# EAGLE board _SHOP MAINTENANCE AND SAFETY SYSTEM FINALLL (EAGLE 7.6.0)

Size 73.58 x 63.39 mm. Coordinates in mm from the lower left corner, seen from the top.
Outline: 0,0 56.82,0 56.82,53.33 0,53.33 0,0
Copper layers (1*16): Top 0.035mm / dielectric 1.5mm / Bottom 0.035mm
Design rules "default": minimum track width 10mil, minimum drill 24mil, track to track 8mil, track to pad 8mil, pad to pad 8mil, via to via 8mil, smd to smd 8mil, copper to edge 40mil, drill to drill 8mil, minimum pad ring 10mil, minimum via ring 8mil, stop-mask expansion 4mil, vias tented up to drill 0mil, thermal gap 10mil

## Footprints (pad centres in the part's own frame; a part is rotated, then mirrored left to right if it is on the bottom)
SNR6-D19.0MM = drill 1.3 pad 2: 1 -3.355,3.355; 2 -3.355,-3.355; 3 3.355,3.355; 4 3.355,-3.355; 5 0,4.75; 6 0,-4.75
M3XXH = drill 1.016 long: 1 -3.81,3.81; 2 -3.81,-3.81; O -6.35,-3.81; P 6.35,-3.81; P@ 6.35,3.81; S -6.35,3.81
2P-2.54-65/35MIL = drill 0.889 pad 1.651 square: 1 0,1.27 | drill 0.889 pad 1.651: 2 0,-1.27
PIEZO-22MM = drill 1 pad 2.54: P$1 -5,0; P$2 5,0
1X3P-2.54-2.54-11.6-3.0-BLACK-MALE = drill 0.889 pad 1.651 square: 1 0,2.54 | drill 0.889 pad 1.651: 2 0,0; 3 0,-2.54
PHOTORESISTOR-2.54 = drill 1 pad 1.5: P$1 -1.27,0; P$2 1.27,0
0207/10 = drill 0.813 octagon: 1 -5.08,0; 2 5.08,0
M251 = drill 0.813 long: 1 -2.54,0; 2 0,0; 3 2.54,0
ARDUINO_UNO = drill 1.016 pad 1.88: 0 63.5,50.8; 1 60.96,50.8; 2 58.42,50.8; 3 55.88,50.8; 3.3V 35.56,2.54; 4 53.34,50.8; 5 50.8,50.8; 5V 38.1,2.54; 6 48.26,50.8; 7 45.72,50.8; 8 41.656,50.8; 9 39.116,50.8; 10 36.576,50.8; 11 34.036,50.8; 12 31.496,50.8; 13 28.956,50.8; A0 50.8,2.54; A1 53.34,2.54; A2 55.88,2.54; A3 58.42,2.54; A4 60.96,2.54; A5 63.5,2.54; AREF 23.876,50.8; GND 26.416,50.8; GND. 43.18,2.54; GND.. 40.64,2.54; I/OREF 30.48,2.54; N/C 27.94,2.54; RESET 33.02,2.54; SCL 18.796,50.8; SDA 21.336,50.8; VIN 45.72,2.54 | hole 3.2: 66.04,7.62; 66.04,35.56; 15.24,50.8; 13.97,2.54

## Placement (x,y rotation side)
GAS1  [SNR6-D19.0MM]  5,175.18 0 top  (outside the outline)
K1  [M3XXH]  5,73.58 0 top  (outside the outline)
K2  [M3XXH]  5,162.48 0 top  (outside the outline)
K3  [M3XXH]  5,251.38 0 top  (outside the outline)
L1  [2P-2.54-65/35MIL]  5,137.08 0 top  (outside the outline)
L2  [2P-2.54-65/35MIL]  5,149.78 0 top  (outside the outline)
L3  [2P-2.54-65/35MIL]  5,276.78 0 top  (outside the outline)
M1  [2P-2.54-65/35MIL]  5,60.88 0 top
P1  5V  [2P-2.54-65/35MIL]  5,86.28 0 top  (outside the outline)
P2  5V  [2P-2.54-65/35MIL]  5,264.08 0 top  (outside the outline)
PIEZO1  [PIEZO-22MM]  5,187.88 0 top  (outside the outline)
PIEZO2  [PIEZO-22MM]  5,225.98 0 top  (outside the outline)
PING1  [1X3P-2.54-2.54-11.6-3.0-BLACK-MALE]  5,22.78 0 top
PIR1  [1X3P-2.54-2.54-11.6-3.0-BLACK-MALE]  5,48.18 0 top
PIR2  [1X3P-2.54-2.54-11.6-3.0-BLACK-MALE]  5,238.68 0 top  (outside the outline)
R1  [PHOTORESISTOR-2.54]  5,111.68 0 top  (outside the outline)
R2  1k‎Ω  [0207/10]  5,124.38 0 top  (outside the outline)
R3  100‎Ω  [0207/10]  5,200.58 0 top  (outside the outline)
R4  1k‎Ω  [0207/10]  5,213.28 0 top  (outside the outline)
R6  [PHOTORESISTOR-2.54]  5,289.48 0 top  (outside the outline)
R7  1k‎Ω  [0207/10]  5,302.18 0 top  (outside the outline)
S1  [M251]  5,98.98 0 top  (outside the outline)
SERVO1  [1X3P-2.54-2.54-11.6-3.0-BLACK-MALE]  5,35.48 0 top
U1  [ARDUINO_UNO]  5,10.08 0 top

## Library data of the parts
GAS1 K1-K3 L1-L3 M1 P1 P2 PIEZO1 PIEZO2 PING1 PIR1 PIR2 R1-R4 R6 R7 S1 SERVO1 U1 = AUTODESK_CIRCUITS_BREADBOARD

## Nets
N$1: PING1.3 U1.6
N$2: SERVO1.3 U1.7
N$3: PIR1.3 U1.9
N$4: K1.S M1.1
N$5: M1.2 S1.1
N$6: K2.P@ K2.S P1.2 S1.2
N$7: K1.2 U1.10
N$8: L1.2 L2.2
N$9: GAS1.1 R3.1
N$10: GAS1.5 PIEZO1.P$2 R3.2
N$11: K3.2 PIEZO1.P$1 U1.8
N$12: PIEZO2.P$1 U1.11
N$13: GAS1.3 R4.1 U1.A1
N$14: PIR2.1 U1.2
N$15: K3.P P2.2
N$16: K3.S L3.1
N$17: L3.2 P2.1
N$18: R1.P$1 R2.2 R6.P$2 R7.2 U1.A0
N$19: K1.P K1.P@ L1.1 P1.1
N$20: K2.O L2.1
N$21: K1.1 K3.1 PIEZO2.P$2 PING1.1 PIR1.1 PIR2.3 R1.P$2 R4.2 R7.1 SERVO1.1 U1.GND U1.GND..
N$22: GAS1.2 GAS1.4 GAS1.6 PING1.2 PIR1.2 PIR2.2 R2.1 R6.P$1 SERVO1.2 U1.5V

## Tracks (layer width: path | path; a pad name or v marks a point on that pad's centre or on a via)
N$1  (1 unrouted)
N$2  (1 unrouted)
N$3  (1 unrouted)
N$4  (1 unrouted)
N$5  (1 unrouted)
N$6  (3 unrouted)
N$7  (1 unrouted)
N$8  (1 unrouted)
N$9  (1 unrouted)
N$10  (2 unrouted)
N$11  (2 unrouted)
N$12  (1 unrouted)
N$13  (2 unrouted)
N$14  (1 unrouted)
N$15  (1 unrouted)
N$16  (1 unrouted)
N$17  (1 unrouted)
N$18  (4 unrouted)
N$19  (3 unrouted)
N$20  (1 unrouted)
N$21  (11 unrouted)
N$22  (9 unrouted)